# Altium PCB Temp_sense_Project 2.0.PcbDoc (part 2 of 4)
Units mm, origin at the board's own origin, x right, y up, seen from the top; angles counter-clockwise.
Board outline 238.51 x 89.79 mm, 4 copper layers (Top Layer, Layer 1, Layer 2, Bottom Layer), stack 0.603 mm thick; 186 components, 160 nets, 969 pads, 267 vias.
Unrouted connection lines stored in the file: 10.
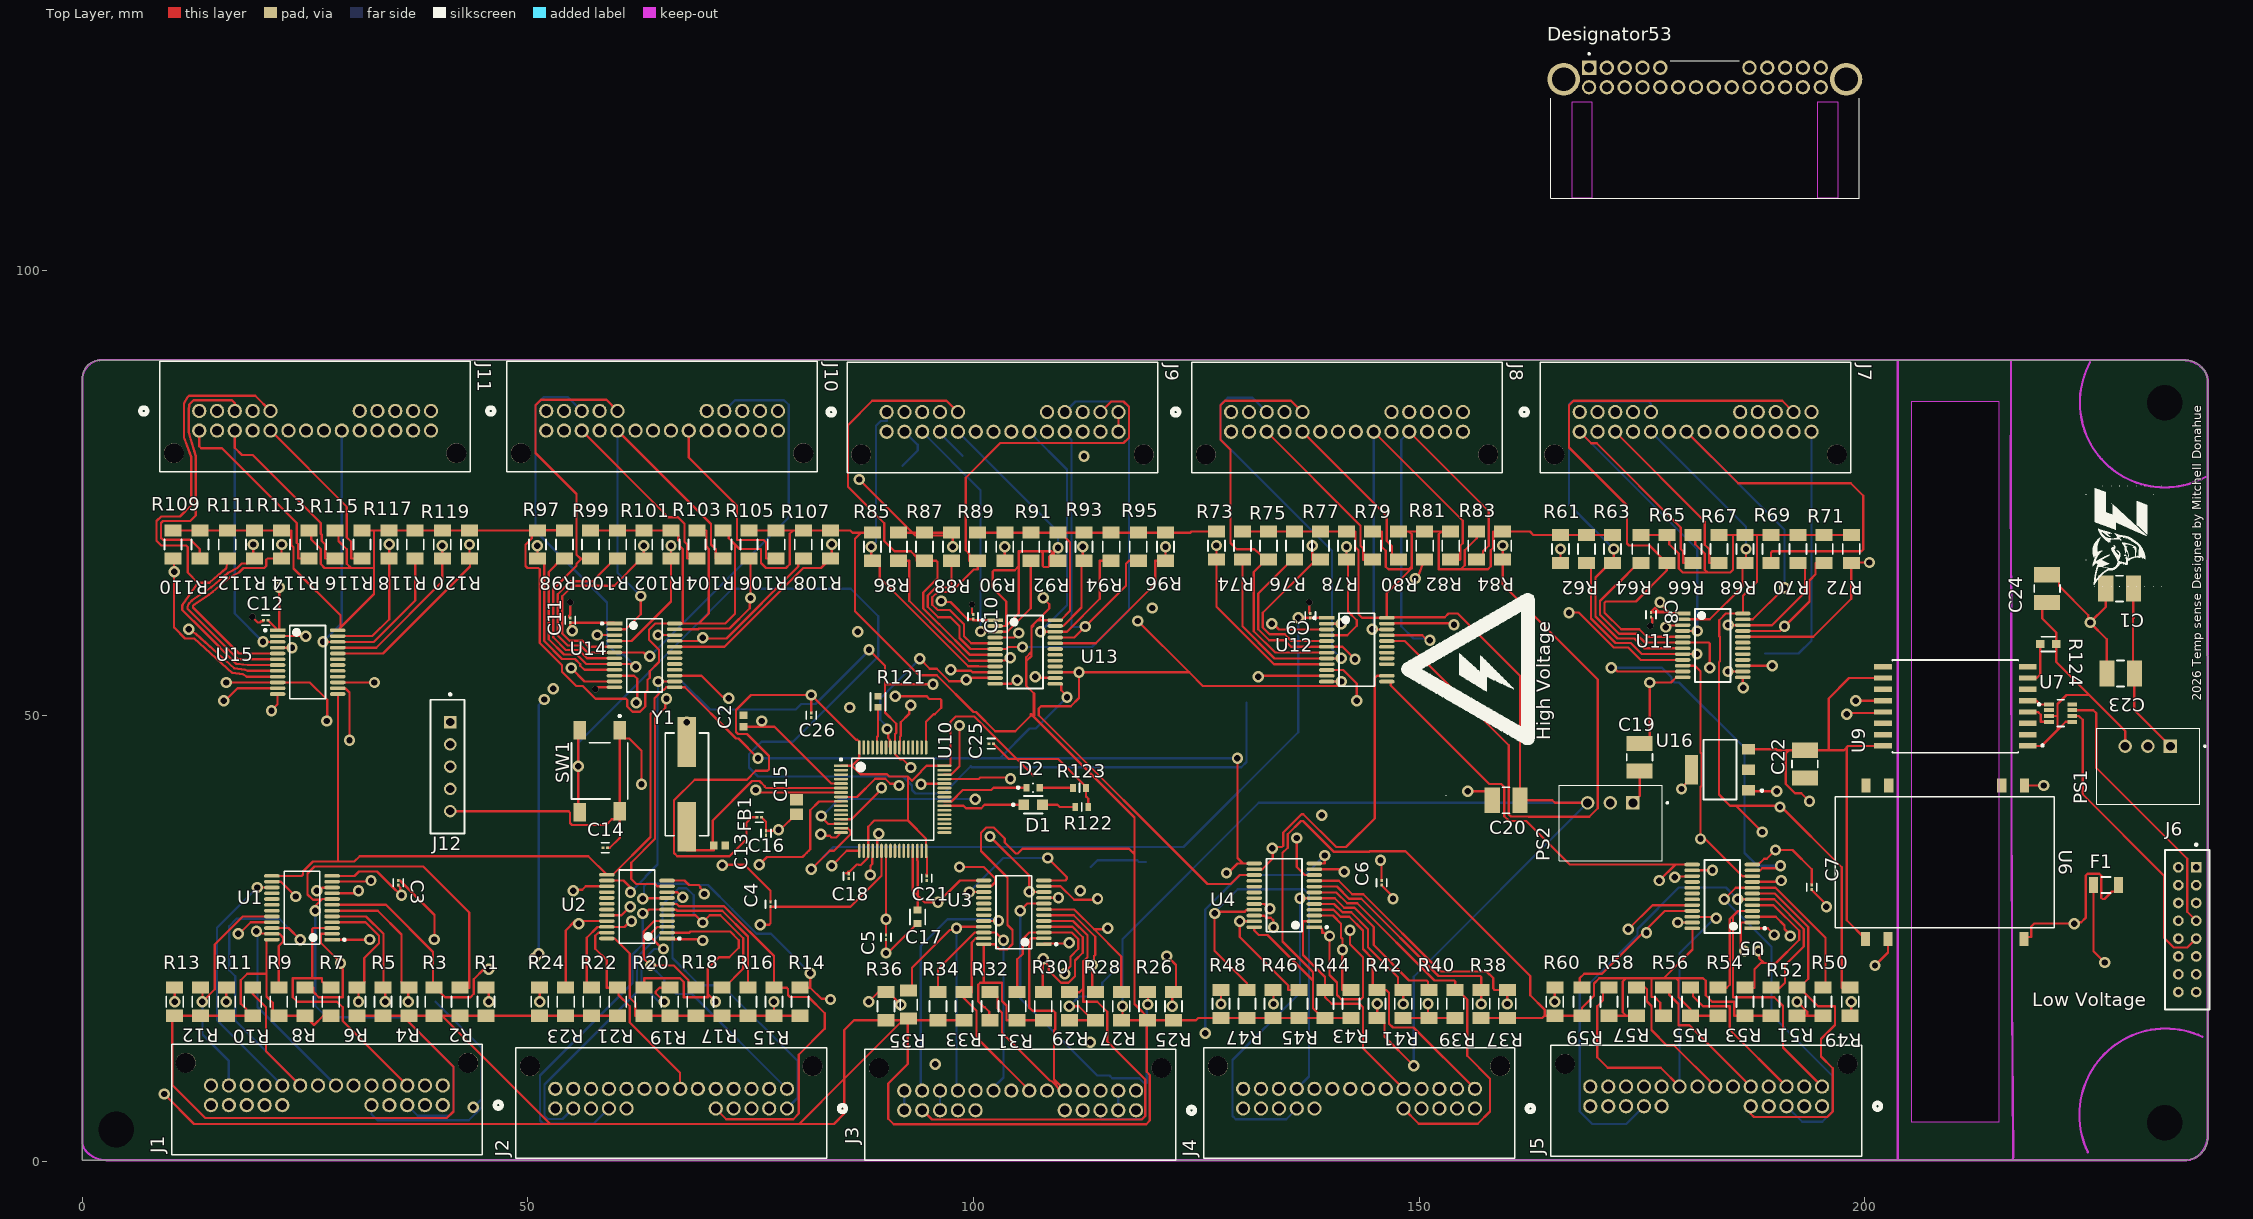
[diagram p0: Top Layer view]

## Via types
v1: diameter 1.27, hole 0.711, Top Layer to Bottom Layer, 261 vias
v2: diameter 0.711, hole 0.711, Top Layer to Bottom Layer, 6 vias

## Nets (pads, with @x,y where several pads share a name; then routed paths per layer and width w, separated by ;. In a path a pad name is that pad's centre, name@x,y a point inside that pad or via, vN(x,y) a via of type N, cw(c..) or ccw(c..) an arc to the next point about the centre after c; other vN are vias at no path point) (continued)
NetC6_1: (continued)
  Layer 2 w0.254: v1(91.626,42.164) 91.626,40.854 92.075,40.405 92.075,39.37 91.694,38.989 88.729,38.989 88.12,38.379 85.896,38.379 84.074,36.558 84.074,36.486 83.275,35.687 76.922,35.687 74.93,33.695 74.93,32.853 75.525,32.258 76.367,32.258 78.78,34.671 83.696,34.671 86.388,37.363 88.541,37.363 89.15,37.973 91.396,37.973 94.234,35.135 94.234,28.677 95.021,27.889 99.492,27.889 99.67,28.067 103.378,28.067 104.546,26.899 107.467,26.899 108.509,27.94 108.509,30.226 109.652,31.369 128.118,31.369 129.282,30.204 129.282,29.994 129.134,29.845 114.975,29.845 114.34,30.48 113.498,30.48 112.903,29.885 112.903,29.043 113.498,28.448 114.34,28.448 114.721,28.829 130.658,28.829 132.131,27.356 132.131,25.908 132.791,25.248 139.929,25.248 v1(139.954,25.273)